# Altium PCB medusaCharger.PcbDoc
Units mil, origin at the board's own origin, x right, y up, seen from the top; angles counter-clockwise.
Board outline 2520 x 1670 mil, 2 copper layers (Top Layer, Bottom Layer); 41 components, 17 nets, 103 pads, 188 vias.
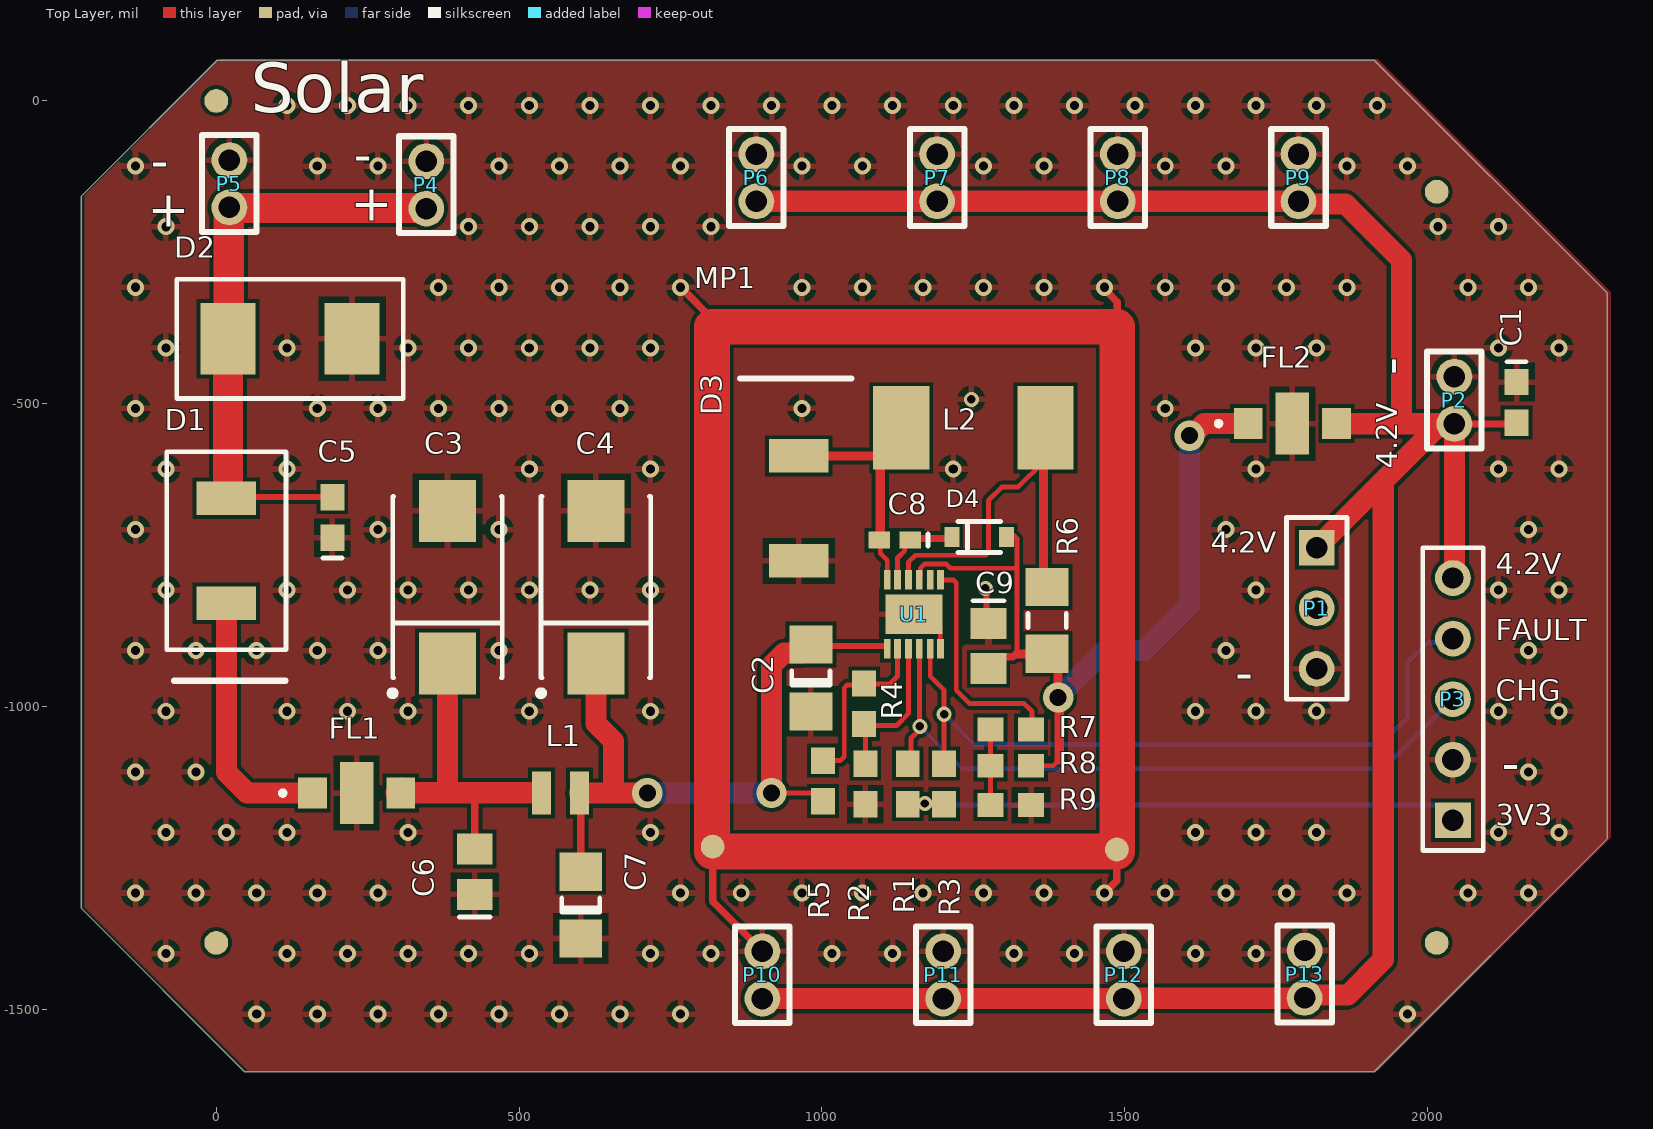
[diagram p0: Top Layer view]
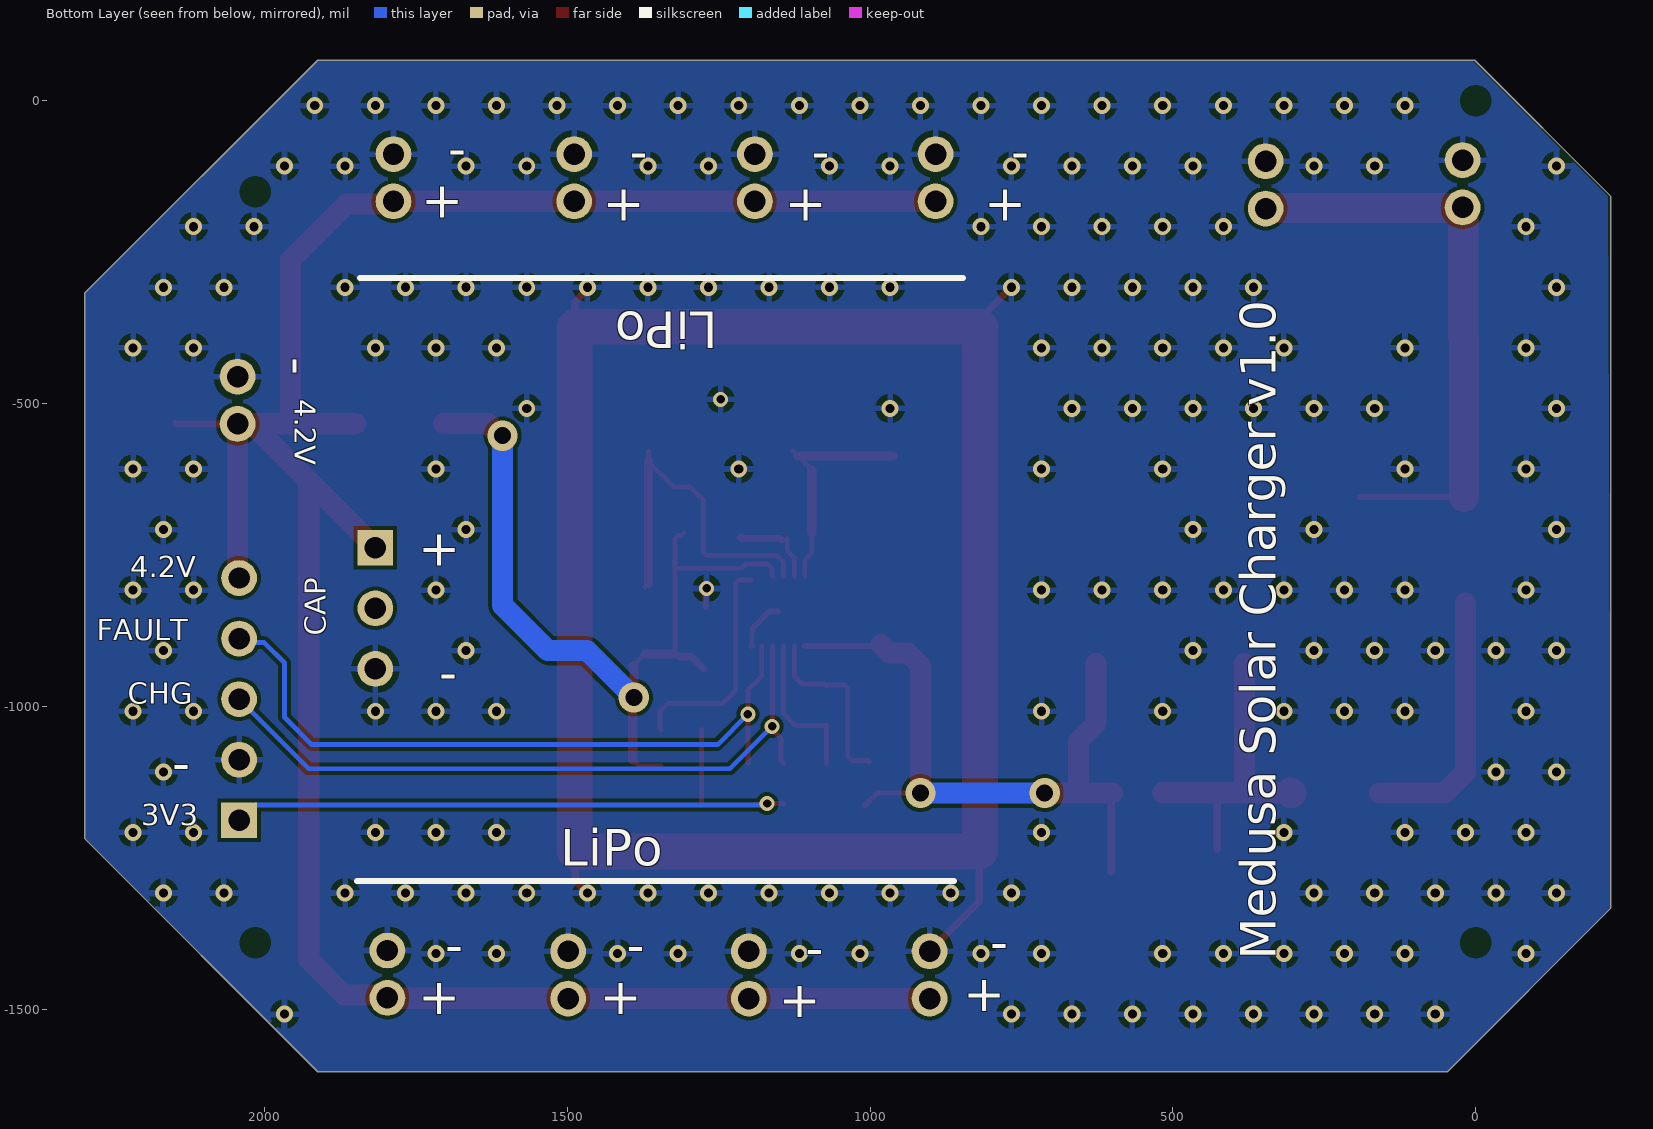
[diagram p1: Bottom Layer view, seen from below]

## Layer stack, top to bottom
Top Solder: solder mask 0.4, Solder Resist, Dk 3.5
Top Layer: signal copper 1.4
Dielectric 1: dielectric 12.6, FR-4, Dk 4.8
Bottom Layer: signal copper 1.4
Bottom Solder: solder mask 0.4, Solder Resist, Dk 3.5

## Board outline
-223.22,-1332.72 -223.22,-157.72 1.78,67.28 1911.78,67.28 2296.78,-317.72 2296.78,-1217.72 1911.78,-1602.72 46.78,-1602.72

## Design rules (kind name [scope] priority, off if disabled: settings)
Clearance [All] p1: gap=6 ignorepadtopadclearanceinfootprint=FALSE
PolygonConnect [All] p1: connectstyle=Relief reliefconductorwidth=10 reliefentries=4 polygonreliefangle="90 Angle" airgapwidth=10
RoutingVias [All] p1: holewidth=28 width=50 viastyle="Through Hole" minholewidth=28 minwidth=50 maxholewidth=28 maxwidth=50
SolderMaskExpansion [All] p1: expansion=4 istentingtop=FALSE
Width [All] p1: maxlimit=50 minlimit=8 preferedwidth=12
30 further rules are at their usual default settings.

## Components (designator, comment, footprint, x,y, rotation, side; value= is the part's Value field where it differs from the comment)
C1 "C0603" 0603 2146.78,-497.72 r270 top
C2 "C1206" 1206 981.78,-952.72 r90 top
C3 "T495X" X 381.78,-802.72 r90 top value=47uF
C4 "T495X" X 626.78,-802.72 r90 top value=47uF
C5 "C0603" 0603 191.78,-687.72 r90 top
C6 "C0805" 0805 426.78,-1272.72 r90 top value=4.7uF
C7 "C1206" 1206 601.78,-1327.72 r90 top
C8 "C0402" 0402 1120,-725 r180 top value=1uF
C9 "C0805" 0805 1275,-900 r270 top
D1 "PMEG3050EP*" Diode_PMEG3050EP 16.78,-742.72 r270 top
D2 "26.7V Breakdown" SMBJ24CA 121.78,-392.72 r0 top
D3 "PMEG3050EP*" Diode_PMEG3050EP 961.78,-672.72 r90 top
D4 "BAT46WJ" SOD-323 1259.72,-720 r0 top
FL1 "YFF31HC2A105MT000N" FIL_YFF31HC2A105MT000N 231.78,-1142.72 r0 top
FL2 "YFF31HC2A105MT000N" FIL_YFF31HC2A105MT000N 1776.78,-532.72 r0 top
L1 "Inductor2016" Inductor2016 536.78,-1142.72 r0 top value=0.47uH
L2 "10uH" Inductor0630CDMCD 1250,-540 r0 top
MP1 "MS223-10F" MS223-10F 1155,-805 r90 top
P1 "3000uF" HDR1X3 1816.78,-737.72 r270 top
P2 "To Load" HDR_2x1_2mm 2044.28,-533.96 r0 top
P3 "Medusa Interface" HDR1X5 2041.78,-1187.72 r90 top
P4 "SOLAR" HDR_2x1_2mm 346.78,-178.35 r0 top
P5 "SOLAR" HDR_2x1_2mm 21.78,-176.46 r0 top
P6 "BAT" HDR_2x1_2mm 891.78,-166.46 r0 top
P7 "BAT" HDR_2x1_2mm 1190.11,-166.46 r0 top
P8 "BAT" HDR_2x1_2mm 1488.45,-166.46 r0 top
P9 "BAT" HDR_2x1_2mm 1786.78,-166.46 r0 top
P10 "BAT" HDR_2x1_2mm 901.78,-1482.72 r0 top
P11 "BAT" HDR_2x1_2mm 1200.11,-1482.72 r0 top
P12 "BAT" HDR_2x1_2mm 1498.45,-1482.72 r0 top
P13 "BAT" HDR_2x1_2mm 1796.78,-1481.46 r0 top
R1 "330K" 3-0603 1141.78,-1127.72 r90 top
R2 "51K" 3-0603 1071.78,-1127.72 r90 top
R3 "330K" 3-0603 1201.78,-1127.72 r90 top
R4 "51K" 3-0603 1069.6,-995.48 r270 top
R5 "536K" 3-0603 1001.78,-1122.72 r90 top
R6 "50mOhms" 8-1206 1371.78,-857.72 r270 top
R7 "205K" 3-0603 1311.78,-1037.72 r0 top
R8 "64K9" 3-0603 1311.78,-1097.72 r180 top
R9 "330K" 3-0603 1311.78,-1162.72 r180 top
U1 "LT3652EDDPBF" DFN300X300X80-13N 1151.78,-847.72 r90 top

## Footprints (in the part's own frame and the unit in brackets; to place one, negate y for a bottom-side part, rotate by r counter-clockwise, add the part's x,y. Pads: shape width x height; smd on the part's side, far side on the other; paste and mask are expansions set on the pad)
3-0603 [mm] "Chip Resistor; Body 1.6 x 0.9 mm (LxW typ)"
  rect 1.1x1 smd: 1(-0.85,0) 2(0.85,0)
8-1206 [mm] "Chip Resistor; Body 3.1 x 1.6 mm (LxW typ)"
  rect 1.6x1.8 smd: 1(-1.4,0) 2(1.4,0)
  silkscreen extent -0.3,-0.8 0.3,0.8
0402 [mm] "Chip Capacitor; Body 1.0 x 0.5 mm (LxW typ)"
  rect 0.9x0.7 smd: 1(-0.65,0) 2(0.65,0)
  silkscreen extent -1.4,-0.25 -1.4,0.25
0603 [mm] "Chip Capacitor; Body 1.6 x 0.8 mm (LxW typ)"
  rect 1.1x1 smd: 1(-0.85,0) 2(0.85,0)
  silkscreen extent -1.7,-0.4 -1.7,0.4
0805 [mm] "Chip Capacitor; Body 2.0 x 1.2 mm (LxW typ)"
  rect 1.3x1.5 smd: 1(-0.95,0) 2(0.95,0)
  silkscreen extent -1.9,-0.65 -1.9,0.65
1206 [mm] "Chip Capacitor; Body 3.2 x 1.6 mm (LxW typ)"
  rect 1.6x1.8 smd: 1(-1.4,0) 2(1.4,0)
  silkscreen extent -0.3,-0.8 0.3,0.8
DFN300X300X80-13N [mil]
  rect 32x11 smd: 1(-57,44) 2(-57,27) 3(-57,9) 4(-57,-9) 5(-57,-27) 6(-57,-44) 7(57,-44) 8(57,-27) 9(57,-9) 10(57,9) 11(57,27) 12(57,44)
  rect 65x94 smd: 13(0,0)
Diode_PMEG3050EP [mm]
  rect 1.4x2.5 smd: A(-2.2,0) K(2.2,0)
  silkscreen extent -4.15,-2.5 5.45,2.5
FIL_YFF31HC2A105MT000N [mm]
  rect 1.2x1.3 smd mask+0: 1(-1.85,0) 3(1.85,0)
  rect 1.4x2.6 smd paste-2 mask+0: 2_4(0,0)
  silkscreen extent -3.2,-0.1 -3,0.1, body extent -1.6,-0.8 1.6,0.8, height 1.5
HDR1X3 [mm] "Connector; Header; 3 Position"
  rect 1.5x1.5 hole 0.9: 1(0,0)
  round 1.5 hole 0.9: 2(2.54,0) 3(5.08,0)
  silkscreen extent -1.27,-1.27 6.35,1.27
HDR1X5 [mm] "Connector; Header; 5 Position"
  rect 1.5x1.5 hole 0.9: 1(0,0)
  round 1.5 hole 0.9: 2(2.54,0) 3(5.08,0) 4(7.62,0) 5(10.16,0)
  silkscreen extent -1.27,-1.27 11.43,1.27
HDR_2x1_2mm [mm]
  round 1.5 hole 0.9: 1(0,0.016) 2(0,2)
  silkscreen extent -1.14,-1.02 1.14,3.05
Inductor0630CDMCD [mm]
  rect 2.35x3.5 smd: 1(-3.025,0) 2(3.025,0)
Inductor2016 [mm]
  rect 0.8x1.8 smd: 1(0,0) 2(1.6,0)
MS223-10F [mm]
  round 1 smd paste-1: 1(-10.825,8.519)
  round 1 smd: 4(-10.945,-8.431)
  Top Layer lines w1.5: -11.025,8.55 -11.025,8.519 -11.025,8.507 -11.025,-8.431 -11.025,-8.45 -10.965,-8.45 -10.945,-8.45 -10.926,-8.45 -10.825,-8.45 -0.019,-8.45 0,-8.45 10.805,-8.45 10.824,-8.45 10.975,-8.45 10.975,-8.431 10.975,8.46 10.975,8.519 10.975,8.55 10.922,8.55 10.885,8.55 10.855,8.55 0,8.55 -0.023,8.55 -9.003,8.55 -10.818,8.55 -10.825,8.55 -10.856,8.55 -11.025,8.55
SMBJ24CA [mm]
  rect 2.3x3 smd: 1(-2.6,0) 2(2.6,0)
  silkscreen extent -4.75,-2.5 4.75,2.5
SOD-323 [mm]
  rect 0.63x0.83 smd: A(1.15,0) C(-1.15,0)
  silkscreen extent -0.9,-0.65 0.9,0.65
X [mm] "Capacitor, SM Tantalum; Body 7.3 x 4.3 mm (LxW typ)"
  rect 2.6x2.4 smd: 1(-3.2,0) 2(3.2,0)
  silkscreen extent -4.57,-2.3 3.8,2.42

## Part data
C1 C2 C6 C7 C8 C9: "Ceramic Chip Capacitor - Standard", PackageDocument=Mar-2001, ComponentLink1Description="Manufacturer Link", ComponentLink1URL=http://www.kemet.com/, ComponentLink2Description=Datasheet, ComponentLink2URL=http://www.kemet.com/kemet/web/homepage/kechome.nsf/vapubfilesname/F3102TA.pdf/$file/F3102TA.pdf, DatasheetDocument=Mar-2001, LatestRevisionDate=19-Mar-2004, LatestRevisionNote="Silkscreen size reduced.", Published=17-Jul-2002, Publisher="Altium Limited"
  C1: 50V=1nF, Code_IPC="1608 [0603]", Code_JEITA=0603, Note="Footprint corresponds to dimensions for bulk cassette packaging. This case size has tightened tolerances.", PackageReference=0603
  C2 C7: 50V=10uF, Code_IPC="3216 [1206]", Code_JEITA=1206, PackageReference=1206
  C6: Code_IPC=2012[0805], Code_JEITA=0805, Note="Footprint corresponds to dimensions for bulk cassette packaging. This case size has tightened tolerances.", PackageReference=0805
  C8: Code_IPC="1005 [0402]", Code_JEITA=0402, Note="Footprint corresponds to dimensions for bulk cassette packaging. This case size has tightened tolerances.", PackageReference=0402
  C9: 6.3V=10uF, Code_IPC=2012[0805], Code_JEITA=0805, Note="Footprint corresponds to dimensions for bulk cassette packaging. This case size has tightened tolerances.", PackageReference=0805
C3 C4: "Solid Tantalum Chip Capacitor, Standard T495 Series - 35V 10%", PackageDocument=Mar-2001, Code_JEITA=7343-43, ComponentLink1Description="Manufacturer Link", ComponentLink1URL=http://www.kemet.com/, ComponentLink2Description=Datasheet, ComponentLink2URL=http://www.kemet.com/kemet/web/homepage/kechome.nsf/vapubfilesname/F3102TA.pdf/$file/F3102TA.pdf, DatasheetDocument=Mar-2001, LatestRevisionDate=19-Mar-2004, LatestRevisionNote="Silkscreen dimensions re-sized.", PackageReference=X, PCB_Layout="Round Glue Pad at 2.9 ±0.1mm in diameter at KEMET's option", Published=17-Jul-2002, Publisher="Altium Limited"
C5: "100V 20%", PackageDocument=Mar-2001, 100V, 20%=100nF, Code_IPC="1608 [0603]", Code_JEITA=0603, ComponentLink1Description="Manufacturer Link", ComponentLink1URL=http://www.kemet.com/, ComponentLink2Description=Datasheet, ComponentLink2URL=http://www.kemet.com/kemet/web/homepage/kechome.nsf/vapubfilesname/F3102TA.pdf/$file/F3102TA.pdf, DatasheetDocument=Mar-2001, LatestRevisionDate=19-Mar-2004, LatestRevisionNote="Silkscreen size reduced.", Note="Footprint corresponds to dimensions for bulk cassette packaging. This case size has tightened tolerances.", PackageReference=0603, Published=17-Jul-2002, Publisher="Altium Limited"
D1 D3: library part Diode_PMEG3050EP
D2: library part SMBJ24CA
D4: "Diode Schottky 100V 250mA (DC) Surface Mount SOD-323F", Package="SOD-323 NXP Semiconductors", Availability=Bad, MF="NXP Semiconductors", MP=BAT46WJ, Price=None, SnapEDA_Link=https://www.snapeda.com/parts/BAT46WJ/NXP%20Semiconductors/view-part/4222338/?ref=snap
FL1 FL2: "1ÂµF Feed Through Capacitor 100V 6A 5mOhm 1206 (3216 Metric), 4 PC Pad", Package="1206 TDK", Availability=Good, Check_prices=https://www.snapeda.com/parts/YFF31HC2A105MT000N/TDK-Lambda%20Americas%20Inc/view-part/566443/?ref=eda, MF=TDK, MP=YFF31HC2A105MT000N, Price=None, Purchase-URL=https://pricing.snapeda.com/search/part/YFF31HC2A105MT000N/?ref=eda, SnapEDA_Link=https://www.snapeda.com/parts/YFF31HC2A105MT000N/TDK-Lambda%20Americas%20Inc/view-part/566443/?ref=snap
L1: Supplier Part Number 1=1276-6902-1-ND, Supplier 1=Digi-Key
L2: library part Inductor_0630CDMCD
MP1: "RF Shield"
P1: library part "Header 3", "Header, 3-Pin", LatestRevisionDate=17-Jul-2002, LatestRevisionNote="Re-released for DXP Platform.", Publisher="Altium Limited"
P2 P4 P5 P6 P7 P8 P9 P10 P11 P12 P13: library part HDR_2x1_2mm
P3: library part "Header 5", "Header, 5-Pin", LatestRevisionDate=17-Jul-2002, LatestRevisionNote="Re-released for DXP Platform.", Publisher="Altium Limited"
R1 R2 R3 R4 R5 R7 R8 R9: library part ERJ3EK, "Precision Thick Film Chip Resistor, 10 Ohm to 1M Ohm Range, 1% and 0.5% Tolerance, 0603 Size, 0.063 W", PackageDocument=Mar-2003, Code_IPC="1608 [0603]", ComponentLink1Description="Manufacturer Link", ComponentLink1URL=http://www.panasonic.com/industrial/components/resistive_products.htm, ComponentLink2Description=Datasheet, ComponentLink2URL=http://www.panasonic.com/industrial/components/pdf/AOA0000CE2.pdf, LatestRevisionDate=19-Mar-2004, LatestRevisionNote="Silkscreen size reduced.", PackageReference=3-0603, Published=17-Dec-2003, Publisher="Altium Limited"
R6: library part ERJ8EN, "Precision Thick Film Chip Resistor, 10 Ohm to 2.2M Ohm Range, 1% Tolerance, 1206 Size, 0.125 W", PackageDocument=Mar-2003, Code_IPC="3216 [1206]", ComponentLink1Description="Manufacturer Link", ComponentLink1URL=http://www.panasonic.com/industrial/components/resistive_products.htm, ComponentLink2Description=Datasheet, ComponentLink2URL=http://www.panasonic.com/industrial/components/pdf/AOA0000CE2.pdf, LatestRevisionDate=19-Mar-2004, LatestRevisionNote="Silkscreen size reduced.", PackageReference=8-1206, Published=17-Dec-2003, Publisher="Altium Limited"
U1: "Power Tracking 2A Battery Charger for Solar Power", Package=None, Availability=Unavailable, MP=LT3652EDDPBF, Price=None

## Free pads (board coordinates)
  round 39.37 smd: 10(0,-1390) 10(0,0) 10(2015,-1390) 10(2015,-150)

## Via types
v1: diameter 28, hole 15, Top Layer to Bottom Layer, tented both sides, 179 vias
v2: diameter 25, hole 14, Top Layer to Bottom Layer, 5 vias
v3: diameter 50, hole 28, Top Layer to Bottom Layer, 4 vias

## Nets (pads, with @x,y where several pads share a name; then routed paths per layer and width w, separated by ;. In a path a pad name is that pad's centre, name@x,y a point inside that pad or via, vN(x,y) a via of type N, cw(c..) or ccw(c..) an arc to the next point about the centre after c; other vN are vias at no path point)
3V3: P3.1 R1.1 R3.1 | length 934.9
  Top Layer w8: R1.1 1142.96,-1160 v2(1170,-1160) ; v2@1168.82,-1161.18 R3.1@1191.78,-1161.18
  Bottom Layer w8: v2(1170,-1160) 1172.19,-1162.19 2016.25,-1162.19 P3.1
4V2: C1.2 FL2.3 P1.1 P2.1 P3.5 P6.1 P7.1 P8.1 P9.1 P10.1 P11.1 P12.1 P13.1 | length 4081.5
  Top Layer w10: C1.2@2144.63,-533.33 C1.2
  Top Layer w12: P2.1 C1.2@2144.63,-533.33
  Top Layer w35: P6.1 P7.1 P8.1 P9.1 1791.38,-170.43 1864.49,-170.43 1956.78,-262.72 1956.78,-533.02 ; P10.1 P11.1 P12.1 1499.08,-1481.46 1796.15,-1481.46 P13.1 1801.38,-1476.22 1868.27,-1476.22 1926.78,-1417.72 1926.78,-632.72 1924.28,-630.22 ; P1.1 1924.28,-630.22 ; FL2.3 1849.92,-533.02 1956.78,-533.02 ; P3.5 2044.28,-785.22 P2.1 ; 1924.28,-630.22 2016.57,-537.93 2039.68,-537.93 P2.1 ; 1956.78,-533.02 2043.97,-533.02 P2.1
BAT: C9.2 D4.A FL2.1 R6.2 R8.1 U1.9 | length 1396.5
  Top Layer w8: U1.9@1160.78,-785.72 1162.28,-784.22 1162.28,-771.57 1169.14,-764.72 1205.42,-764.72 1212.28,-771.57 1321.78,-771.57 ; D4.A@1307.06,-712.72 1312.06,-717.72 1317.09,-717.72 1321.78,-722.4 1321.78,-759.72 1321.78,-762.72 1321.78,-771.57 ; 1323.14,-912.83 1321.78,-911.47 1321.78,-771.57 ; R8.1 1381.78,-1097.72 1391.78,-1087.72 ; R6.2 R6.2@1391.78,-932.83
  Top Layer w12: C9.2 1294.59,-917.81 1315.44,-917.81 1321.78,-911.47
  Top Layer w15: 1323.14,-912.83 R6.2 ; 1391.78,-1087.72 1391.78,-986.78 v3(1390,-985) 1390,-934.61 R6.2@1391.78,-932.83
  Top Layer w35: v3(1606.78,-552.72) 1610.84,-552.72 1630.84,-532.72 FL2.1
  Bottom Layer w35: v3(1390,-985) 1467.58,-907.42 1532.07,-907.42 1606.78,-832.72 v3(1606.78,-552.72)
BOOST: C8.1 D4.C U1.11 | length 139.1
  Top Layer w8: U1.11@1124.78,-785.72 1124.78,-754.72 1136.78,-742.72 C8.1@1136.78,-722.49
  Top Layer w12: C8.1 1148.09,-722.5 1211.95,-722.5 D4.C
CHRG: P3.3 R1.2 U1.4 | length 1159
  Top Layer w8: R1.2 1146.78,-1089.25 1146.78,-1052.72 1160.78,-1038.72 U1.4@1160.78,-899.72
  Bottom Layer w8: v2(1161.78,-1032.72) 1231.78,-1102.72 1926.78,-1102.72 P3.3
FAULT: P3.4 R3.2 U1.5 | length 1190
  Top Layer w8: U1.5@1178.78,-899.72 1178.78,-949.72 1201.78,-972.72 v2(1201.78,-1012.72) R3.2
  Bottom Layer w8: v2(1201.78,-1012.72) 1251.78,-1062.72 1921.78,-1062.72 1966.78,-1017.72 1966.78,-927.72 2000.25,-894.24 2035.25,-894.24 P3.4
GND: C1.1 C2.1 C3.2 C4.2 C5.1 C6.1 C7.1 C9.1 D2.2 D3.A FL1.2_4 FL2.2_4 MP1.1 MP1.4 P1.3 P2.2 P3.2 P4.2 P5.2 P6.2 P7.2 P8.2 P9.2 P10.2 P11.2 P12.2 P13.2 R2.1 R9.1 U1.6 U1.13 | length 563
  Top Layer w8: U1.13@1193.78,-870.22 1193.78,-877.66 1195.28,-879.16 U1.6@1195.28,-899.22
  Top Layer w10: U1.13@1151.78,-842.72 1166.28,-842.72 U1.13@1193.78,-870.22 ; U1.6@1195.28,-899.22 U1.6@1195.78,-899.72 ; v2(1270,-805) 1271.78,-806.78 1271.78,-835.31
  Top Layer w12: v1(766.78,-307.72) 821.91,-362.85 821.91,-372.91 ; MP1.1@818.39,-1239.06 819.59,-1240.26 819.59,-1321.79 P10.2 ; v1(1466.78,-1307.72) 1486.91,-1287.58 1486.91,-1239.06 MP1.4 ; v1(1466.78,-307.72) 1466.78,-311.18 1487.68,-332.07 1487.68,-372.91 1487.68,-378.85 1487.68,-379.61
  other v1: 66.78,-1507.72 166.78,-1507.72 266.78,-1507.72 366.78,-1507.72 466.78,-1507.72 566.78,-1507.72 666.78,-1507.72 766.78,-1507.72 1966.78,-1507.72 -83.22,-1407.72 116.78,-1407.72 216.78,-1407.72 316.78,-1407.72 416.78,-1407.72 516.78,-1407.72 716.78,-1407.72 816.78,-1407.72 1016.78,-1407.72 1116.78,-1407.72 1316.78,-1407.72 1416.78,-1407.72 1616.78,-1407.72 1716.78,-1407.72 -133.22,-1307.72 -33.22,-1307.72 66.78,-1307.72 166.78,-1307.72 266.78,-1307.72 766.78,-1307.72 866.78,-1307.72 966.78,-1307.72 1066.78,-1307.72 1166.78,-1307.72 1266.78,-1307.72 1366.78,-1307.72 1566.78,-1307.72 1666.78,-1307.72 1766.78,-1307.72 1866.78,-1307.72 2066.78,-1307.72 2166.78,-1307.72 -83.22,-1207.72 16.78,-1207.72 116.78,-1207.72 316.78,-1207.72 716.78,-1207.72 1616.78,-1207.72 1716.78,-1207.72 1816.78,-1207.72 2116.78,-1207.72 2216.78,-1207.72 -133.22,-1107.72 -33.22,-1107.72 2166.78,-1107.72 -83.22,-1007.72 116.78,-1007.72 216.78,-1007.72 316.78,-1007.72 516.78,-1007.72 716.78,-1007.72 1616.78,-1007.72 1716.78,-1007.72 1816.78,-1007.72 2116.78,-1007.72 2216.78,-1007.72 -133.22,-907.72 -33.22,-907.72 66.78,-907.72 166.78,-907.72 266.78,-907.72 466.78,-907.72 1666.78,-907.72 2166.78,-907.72 -83.22,-807.72 116.78,-807.72 216.78,-807.72 316.78,-807.72 416.78,-807.72 516.78,-807.72 616.78,-807.72 716.78,-807.72 1716.78,-807.72 2116.78,-807.72 2216.78,-807.72 -133.22,-707.72 266.78,-707.72 466.78,-707.72 1666.78,-707.72 2166.78,-707.72 -83.22,-607.72 116.78,-607.72 516.78,-607.72 716.78,-607.72 1216.78,-607.72 1716.78,-607.72 2116.78,-607.72 2216.78,-607.72 -133.22,-507.72 166.78,-507.72 266.78,-507.72 366.78,-507.72 466.78,-507.72 566.78,-507.72 666.78,-507.72 966.78,-507.72 1566.78,-507.72 -83.22,-407.72 116.78,-407.72 316.78,-407.72 416.78,-407.72 516.78,-407.72 616.78,-407.72 716.78,-407.72 1616.78,-407.72 1716.78,-407.72 1816.78,-407.72 2116.78,-407.72 2216.78,-407.72 -133.22,-307.72 366.78,-307.72 466.78,-307.72 566.78,-307.72 666.78,-307.72 966.78,-307.72 1066.78,-307.72 1166.78,-307.72 1266.78,-307.72 1366.78,-307.72 1566.78,-307.72 1666.78,-307.72 1766.78,-307.72 1866.78,-307.72 2066.78,-307.72 2166.78,-307.72 -83.22,-207.72 416.78,-207.72 516.78,-207.72 616.78,-207.72 716.78,-207.72 816.78,-207.72 2016.78,-207.72 2116.78,-207.72 -133.22,-107.72 166.78,-107.72 266.78,-107.72 466.78,-107.72 566.78,-107.72 666.78,-107.72 766.78,-107.72 966.78,-107.72 1066.78,-107.72 1266.78,-107.72 1366.78,-107.72 1566.78,-107.72 1666.78,-107.72 1866.78,-107.72 1966.78,-107.72 116.78,-7.72 216.78,-7.72 316.78,-7.72 416.78,-7.72 516.78,-7.72 616.78,-7.72 716.78,-7.72 816.78,-7.72 916.78,-7.72 1016.78,-7.72 1116.78,-7.72 1216.78,-7.72 1316.78,-7.72 1416.78,-7.72 1516.78,-7.72 1616.78,-7.72 1716.78,-7.72 1816.78,-7.72 1916.78,-7.72
  other v2: 1246.78,-492.72
NetC2_2: C2.2 C4.1 C7.2 L1.2 R5.1 U1.1 | length 1190.4
  Top Layer w8: v3(916.78,-1142.72) 988.32,-1142.72 R5.1 ; C2.2 C2.2@983.9,-899.72
  Top Layer w10: L1.2 L1.2@601.78,-1144.72 ; C2.2@983.9,-899.72 U1.1@1107.78,-899.72 ; R5.1 R5.1@1008.32,-1162.72
  Top Layer w12: C7.2 L1.2@601.78,-1144.72
  Top Layer w35: L1.2 655.78,-1142.72 ; C4.1 626.78,-1027.72 655.78,-1056.71 655.78,-1142.72 ; v3(711.78,-1142.72) 655.78,-1142.72 ; v3(916.78,-1142.72) 916.78,-932.1 937.28,-911.59 967.78,-911.59 C2.2
  Bottom Layer w35: v3(711.78,-1142.72) v3(916.78,-1142.72)
NetC3_1: C3.1 C6.2 FL1.3 L1.1 | length 521.1
  Top Layer w12: C6.2 426.78,-1142.12
  Top Layer w35: FL1.3@305.21,-1142.12 386.78,-1142.12 ; C3.1 381.78,-1137.12 386.78,-1142.12 ; 516.78,-1142.12 426.78,-1142.12 386.78,-1142.12
  Top Layer w50: FL1.3 FL1.3@305.21,-1142.12
NetC8_2: C8.2 D3.K L2.1 U1.12 | length 383.4
  Top Layer w8: C8.2@1096.19,-712.72 1096.19,-747.12 1107.78,-758.72 U1.12@1107.78,-785.72 ; 1096.19,-609.21 1119.3,-586.1 L2.1@1127.69,-577.72
  Top Layer w15: D3.K L2.1@1119.3,-586.1 ; C8.2@1096.19,-712.72 1096.19,-609.21
NetD1_K: D1.K FL1.1 | length 435.5
  Top Layer w35: D1.K 16.78,-1108.43 51.07,-1142.72 FL1.1
NetR2_2: R2.2 R4.2 U1.3 | length 254.1
  Top Layer w8: R2.2 1071.78,-1031.18 1123.32,-1031.18 1142.78,-1011.72 U1.3@1142.78,-899.72
NetR4_1: R4.1 R5.2 U1.2 | length 300.2
  Top Layer w8: R5.2@1001.78,-1091.22 R5.2 1030.24,-1089.25 1036.78,-1082.72 1036.78,-968.94 1041.47,-964.25 R4.1@1071.78,-964.25 ; R4.1@1071.78,-966.22 1075.28,-962.72 1111.78,-962.72 1124.78,-949.72 U1.2@1124.78,-899.72
NetR7_1: R7.1 R8.2 R9.2 | length 125
  Top Layer w8: R9.2 R7.1
SENSE: L2.2 R6.1 U1.10 | length 593.6
  Top Layer w8: U1.10@1142.78,-785.72 1142.78,-761.72 1154.5,-750 1270.31,-750 1275,-745.31 1275,-659.5 1296.78,-637.72 1323.61,-637.72 1365.87,-595.46 L2.2@1365.87,-577.72 ; R6.1@1365.87,-796.69 R6.1
  Top Layer w15: R6.1@1365.87,-796.69 L2.2@1365.87,-595.46
VFB: R7.2 U1.7 | length 375.6
  Top Layer w8: U1.7 1217.09,-790.72 1221.78,-795.4 1221.78,-973.03 1243.75,-995 1334.06,-995 1346.78,-1007.72 1346.78,-1036.18 R7.2
VIN: C5.2 D1.A D2.1 P4.1 P5.1 | length 977.1
  Top Layer w10: D1.A@19.42,-653.54 20.13,-654.25 C5.2
  Top Layer w50: D1.A@19.42,-653.54 D2.1 20.6,-391.53 20.6,-177.01 P5.1 22.72,-176.77 345.84,-176.77 P4.1
pads on no net: P1.2 U1.8

## Polygon pours and split planes (outlines as drawn)
GND on Bottom Layer "GND_L02_P001" (solid, pour order 1): -218.22,-157.72 6.78,67.28 1911.78,67.28 2296.78,-317.72 2296.78,-1217.72 1911.78,-1602.72 46.78,-1602.72 -223.22,-1332.72
GND on Top Layer "GND_L01_P000" (solid, pour order 0): -217.37,-155.91 7.63,69.09 1917.63,69.09 2302.63,-315.91 2302.63,-1215.91 1917.63,-1600.91 52.63,-1600.91 -217.37,-1330.91 -217.37,-1325.91

## Silkscreen, mask and mechanical layers (free items; w line width, h text height)
Top Overlay:
  text "Solar" at 56.78,-46.16 h140
  text "-" at 226.78,-117.71 h60
  text "-" at -108.22,-127.71 h60
  text "+" at 221.78,-197.71 h60
  text "+" at -113.22,-207.71 h60
  text "-" at 1966.77,-452.72 h60 r90
  text "4.2V" at 1961.78,-607.72 h60 r90
  text "4.2V" at 1642.28,-757.72 h60
  text "4.2V" at 2112.28,-792.72 h60
  text "FAULT" at 2112.28,-902.05 h60
  text "-" at 1682.28,-972.71 h60
  text "CHG" at 2112.28,-1002.05 h60
  text "-" at 2122.28,-1122.71 h60
  text "3V3" at 2112.28,-1207.05 h60
Bottom Overlay:
  lines w10: 846.78,-292.72 1841.78,-292.72 ; 861.78,-1287.72 1846.78,-1287.72
  text "-" at 1666.78,-107.71 h60
  text "-" at 736.78,-112.71 h60
  text "-" at 1066.78,-112.71 h60
  text "-" at 1366.78,-112.71 h60
  text "+" at 1671.78,-192.71 h60
  text "+" at 741.78,-197.71 h60
  text "+" at 1071.78,-197.71 h60
  text "+" at 1371.78,-197.71 h60
  text "LiPo" at 1251.78,-347.72 h60 r180
  text "-" at 1971.77,-452.72 h60 r90
  text "4.2V" at 1961.78,-492.72 h60 r90
  text "+" at 1676.78,-767.71 h60
  text "4.2V" at 2221.67,-797.72 h60
  text "CAP" at 1887.45,-882.72 h60 r270
  text "FAULT" at 2276.78,-902.05 h60
  text "-" at 1681.78,-972.71 h60
  text "CHG" at 2225.5,-1007.05 h60
  text "-" at 2122.28,-1122.71 h60
  text "3V3" at 2203.08,-1207.05 h60
  text "LiPo" at 1511.78,-1262.72 h60
  text "Medusa Solar Charger v1.0" at 310.56,-1417.72 h100 r270
  text "-" at 771.78,-1417.71 h60
  text "-" at 1371.78,-1422.71 h60
  text "-" at 1671.78,-1422.71 h60
  text "-" at 1076.78,-1427.71 h60
  text "+" at 776.78,-1502.71 h60
  text "+" at 1376.78,-1507.71 h60
  text "+" at 1676.78,-1507.71 h60
  text "+" at 1081.78,-1512.71 h60
Mechanical 1:
  the board outline again, w10